# Altium PCB scope_in_pcb.PcbDoc
Units mm, origin at the board's own origin, x right, y up, seen from the top; angles counter-clockwise.
Board outline 107 x 44.9 mm, 2 copper layers (Top Layer, Bottom Layer); 79 components, 59 nets, 236 pads, 54 vias.
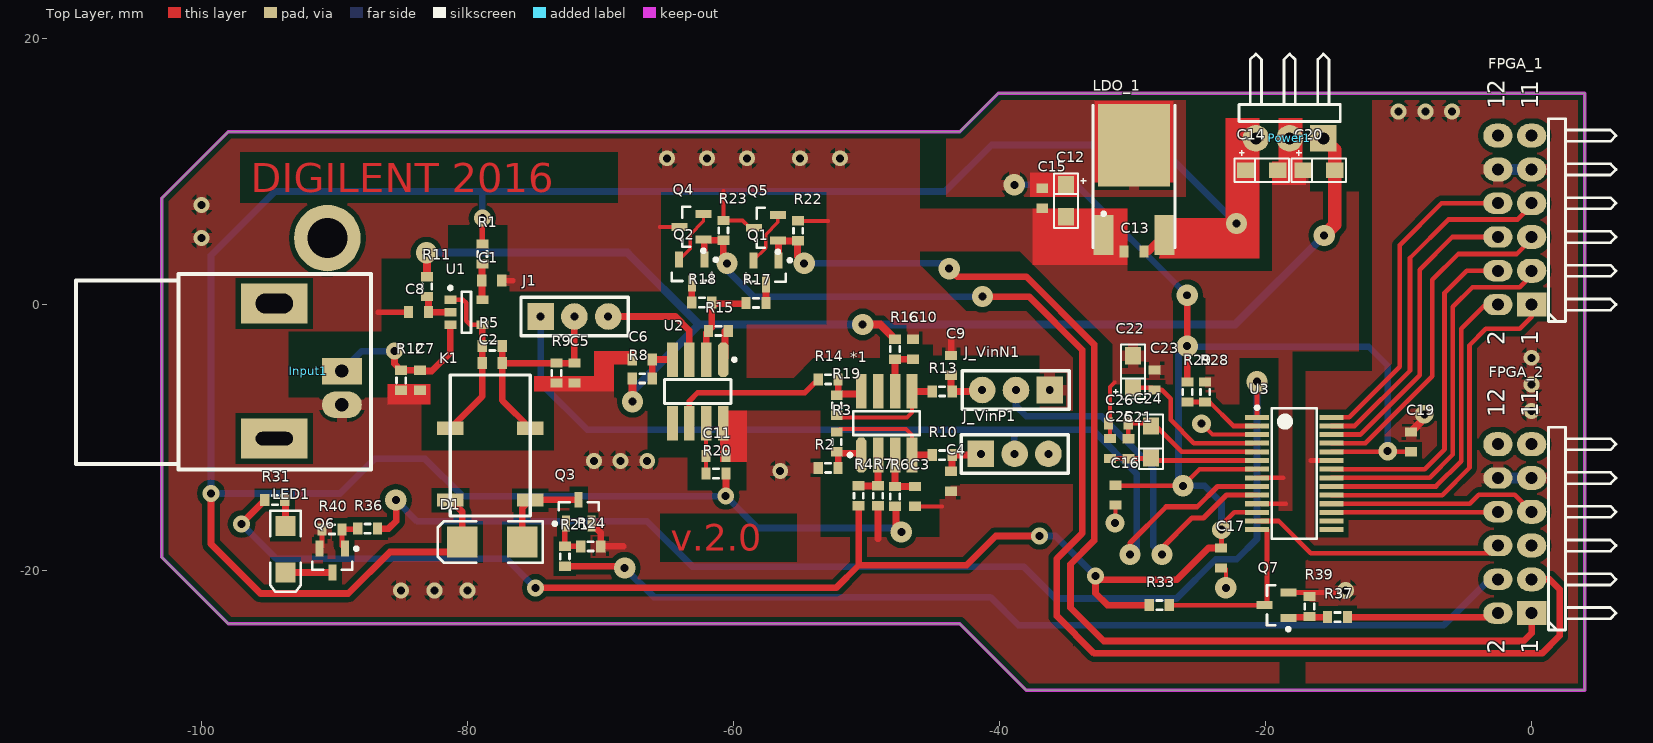
[diagram p0: Top Layer view]
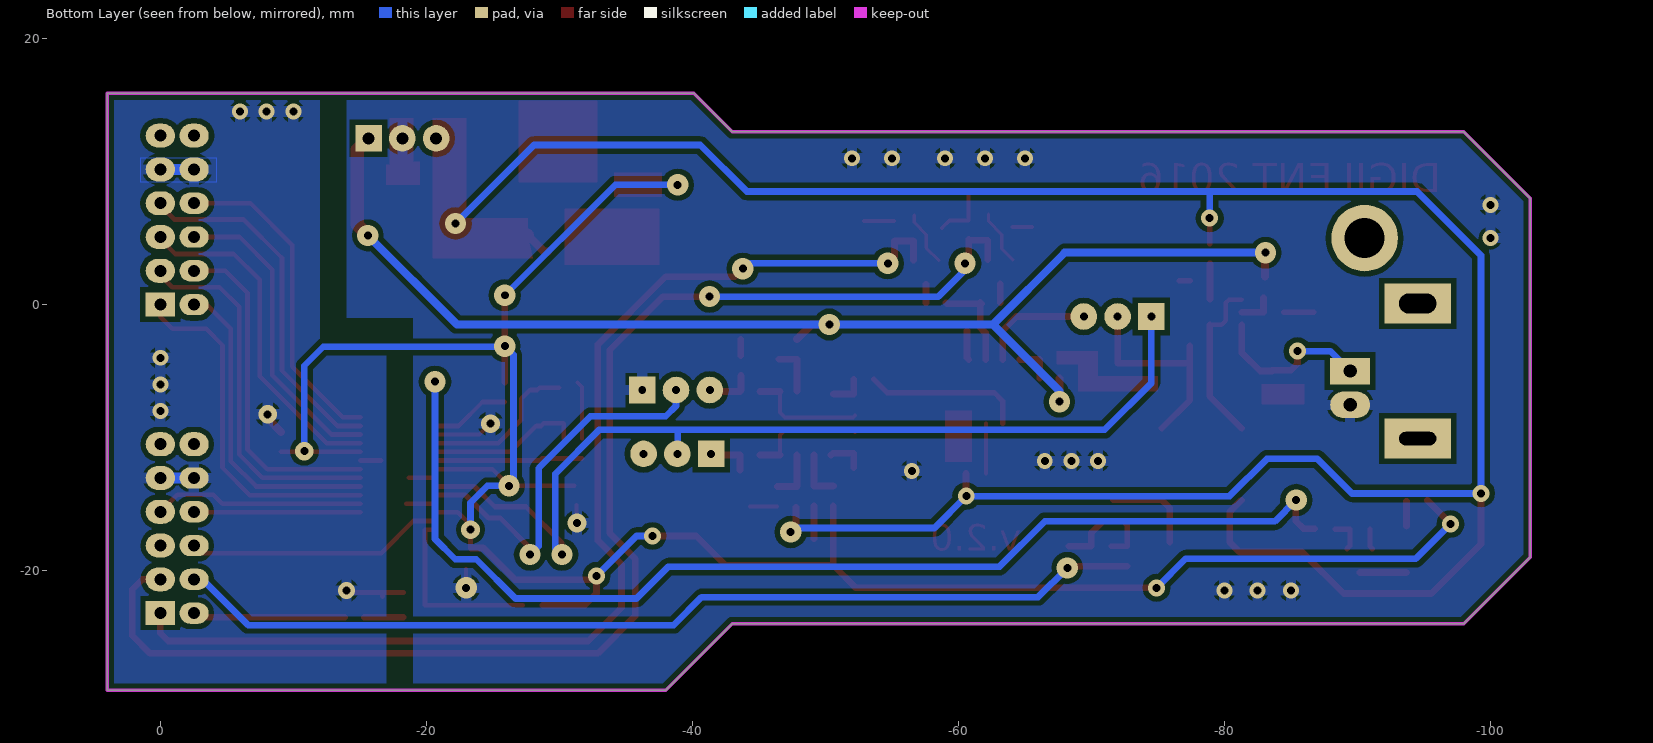
[diagram p1: Bottom Layer view, seen from below]
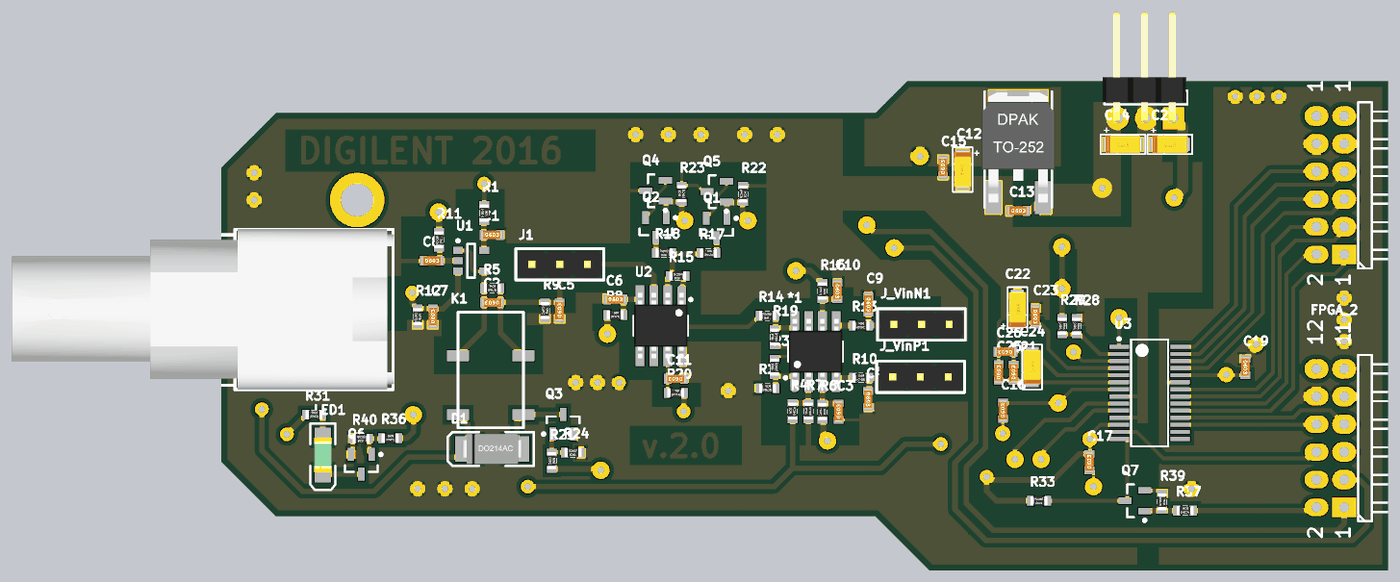
[diagram p2: 3D render of the assembled board from above, using the file's embedded part models]

## Layer stack, top to bottom
Top Solder: solder mask 0.0102, Solder Resist, Dk 3.5
Top Layer: signal copper 0.0356
Dielectric1: dielectric 0.32, FR-4, Dk 4.8
Bottom Layer: signal copper 0.0356
Bottom Solder: solder mask 0.0102, Solder Resist, Dk 3.5

## Board outline
-103,-19 -98,-24 -43,-24 -38,-29 4,-29 4,15.9 -40.1,15.9 -43,13 -98,13 -103,8

## Design rules (kind name [scope] priority, off if disabled: settings)
Clearance [All] p1: gap=0.4
DiffPairsRouting [All] p1: maxlimit=0.254 minlimit=0.254 mostfreqgap=0.254 toplayer_minwidth=0.381 toplayer_maxwidth=0.381 toplayer_prefwidth=0.381 bottomlayer_minwidth=0.381 bottomlayer_maxwidth=0.381 bottomlayer_prefwidth=0.381 maxuncoupledlength=12.7
PolygonConnect [All] p1: connectstyle=Relief reliefconductorwidth=0.8 reliefentries=4 polygonreliefangle="90 Angle" airgapwidth=0.254
RoutingVias [All] p1: holewidth=0.711 width=1.27 viastyle="Through Hole" minholewidth=0.711 minwidth=1.27 maxholewidth=0.711 maxwidth=1.27
SolderMaskExpansion [All] p1: expansion=0.102
UnpouredPolygon [All] p1: allowunpoured=FALSE
Width [All] p1: maxlimit=2 minlimit=0.1 preferedwidth=0.5
28 further rules are at their usual default settings.

## Classes and differential pairs
differential pair VIN: +VIN_P -VIN_N

## Components (designator, comment, footprint, x,y, rotation, side; value= is the part's Value field where it differs from the comment)
*1 "AD8138" "SOIC 8 pini" -48.5,-8.925 r90 top
C1 "Cap" "Condensator SMD(1608)" -78.2,1.8 r270 top
C2 "Cap" "Condensator SMD(1608)" -78.15,-4.4 r90 top
C3 "Cap" "Condensator SMD(1608)" -46.375,-14.425 r0 top
C4 "Cap" "Condensator SMD(1608)" -43.675,-13.275 r180 top
C5 "Cap" "Condensator SMD(1608)" -71.975,-5.15 r0 top
C6 "Cap" "Condensator SMD(1608)" -66.875,-4.125 r270 top
C7 "Cap" "Condensator SMD(1608)" -83.6,-5.7 r0 top
C8 "Cap" "Condensator SMD(1608)" -83.7,-0.575 r270 top
C9 "Cap" "Condensator SMD(1608)" -43.65,-4.575 r180 top
C10 "Cap" "Condensator SMD(1608)" -46.5,-3.35 r180 top
C11 "Cap" "Condensator SMD(1608)" -61.325,-11.4 r90 top
C12 "Cap Pol1" "case A" -35,7.8 r270 top
C13 "Cap" "Condensator SMD(1608)" -29.9,4 r270 top
C14 "Cap Pol1" "case A" -20.3,10.1 r0 top
C15 "Cap" "Condensator SMD(1608)" -36.8,8 r0 top
C16 "Cap" "Condensator SMD(1608)" -31.3,-14.325 r0 top
C17 "Cap" "Condensator SMD(1608)" -23.375,-19.05 r0 top
C19 "Cap" "Condensator SMD(1608)" -9.075,-10.325 r180 top
C20 "Cap Pol1" "case A" -16,10.1 r0 top
C21 "Cap" "Condensator SMD(1608)" -30.325,-10.85 r0 top
C22 "Cap Pol1" "case A" -29.975,-5.05 r90 top
C23 "Cap" "Condensator SMD(1608)" -28.346,-5.671 r180 top
C24 "Cap Pol1" "case A" -28.625,-10.325 r90 top
C25 "Cap" "Condensator SMD(1608)" -31.7,-10.825 r0 top
C26 "Cap" "Condensator SMD(1608)" -31.075,-8.925 r90 top
D1 "1N4007" diodaSMD -78.15,-17.85 r90 top
FPGA_1 "Header 6X2H" HDR2X6H#1 0,0 r90 top
FPGA_2 "Header 6X2H" HDR2X6H#2 0,-23.2 r90 top
Input1 "BNC" "BNC CONNECTOR" -96,-5 r90 top
J1 "Header 3" hdr3 -71.975,-0.9 r0 top
J_VinN1 "Header 3" hdr3 -38.775,-6.425 r180 top
J_VinP1 "Header 3" hdr3 -38.875,-11.225 r0 top
K1 "Relay-SPST" Signal_relay_5VDC -78.3,-12 r90 top
LDO_1 "Component_1" TO-252[me] -29.9,8.6 r0 top
LED1 "LED1" "led smd verde" -93.7,-18.4 r270 top
Power1 "Header 3H" 3pin_header_90 -18.2,12.5 r270 top
Q1 "MOSFET-N" SOT23-3L -57.575,2.425 r270 top
Q2 "MOSFET-N" SOT23-3L -63.15,2.475 r270 top
Q3 "BC547" SOT23-3L -71.65,-15.575 r90 top
Q4 "MOSFET-N" SOT23-3L -63.175,5.85 r180 top
Q5 "MOSFET-N" SOT23-3L -57.575,5.775 r180 top
Q6 "BC547" SOT23-3L -90.175,-19.25 r270 top
Q7 "BC547" SOT23-3L -19.2,-22.6 r180 top
R1 "Res2" "RezistorSMD (1608)" -78.9,3.8 r270 top
R2 "Res2" "RezistorSMD (1608)" -52.9,-12.275 r0 top
R3 "Res2" "RezistorSMD (1608)" -52.25,-10.325 r90 top
R4 "Res2" "RezistorSMD (1608)" -50.6,-14.375 r90 top
R5 "Res2" "RezistorSMD (1608)" -78.15,-3.1 r0 top
R6 "Res2" "RezistorSMD (1608)" -47.875,-14.425 r270 top
R7 "Res2" "RezistorSMD (1608)" -49.15,-14.375 r90 top
R8 "Res2" "RezistorSMD (1608)" -66.875,-5.55 r0 top
R9 "Res2" "RezistorSMD (1608)" -73.325,-5.15 r270 top
R10 "Res2" "RezistorSMD (1608)" -44.325,-11.325 r0 top
R11 "Res2" "RezistorSMD (1608)" -83.05,1.35 r270 top
R12 "Res2" "RezistorSMD (1608)" -85,-5.7 r270 top
R13 "Res2" "RezistorSMD (1608)" -44.325,-6.525 r0 top
R14 "Res2" "RezistorSMD (1608)" -52.9,-5.625 r180 top
R15 "Res2" "RezistorSMD (1608)" -61.15,-1.975 r180 top
R16 "Res2" "RezistorSMD (1608)" -47.875,-3.35 r270 top
R17 "Res2" "RezistorSMD (1608)" -58.325,0.125 r0 top
R18 "Res2" "RezistorSMD (1608)" -62.4,0.15 r180 top
R19 "Res2" "RezistorSMD (1608)" -52.25,-7.575 r90 top
R20 "Res2" "RezistorSMD (1608)" -61.325,-12.7 r0 top
R21 "Res2" "RezistorSMD (1608)" -72.7,-18.925 r270 top
R22 "Res2" "RezistorSMD (1608)" -55.15,5.55 r270 top
R23 "Res2" "RezistorSMD (1608)" -60.775,5.575 r90 top
R24 "Res2" "RezistorSMD (1608)" -70.75,-18.175 r180 top
R28 "Res2" "RezistorSMD (1608)" -24.55,-6.575 r270 top
R29 "Res2" "RezistorSMD (1608)" -25.875,-6.575 r270 top
R31 "Res2" "RezistorSMD (1608)" -94.5,-14.7 r0 top
R33 "Res2" "RezistorSMD (1608)" -28,-22.6 r180 top
R36 "Res2" "RezistorSMD (1608)" -87.525,-16.85 r0 top
R37 "Res2" "RezistorSMD (1608)" -14.6,-23.5 r0 top
R39 "Res2" "RezistorSMD (1608)" -16.7,-22.7 r270 top
R40 "Res2" "RezistorSMD (1608)" -90.2,-16.9 r180 top
U1 "OPA659" SOT23-5_L -80.1,-0.575 r0 top
U2 "ADA4857-1" "SOIC 8 pini" -62.7,-6.525 r270 top
U3 "AD9215" TSSOP28_L -17.85,-12.7 r0 top

## Footprints (in the part's own frame and the unit in brackets; to place one, negate y for a bottom-side part, rotate by r counter-clockwise, add the part's x,y. Pads: shape width x height; smd on the part's side, far side on the other; paste and mask are expansions set on the pad)
3pin_header_90 [mm]
  rect 2x2 hole 0.9: 1(0,2.54)
  round 2 hole 0.9: 2(0,0) 3(0,-2.54)
  silkscreen extent -6.35,-3.81 -1.27,3.81, body extent -9.75,-3.94 0.38,3.68, height 2.51
"BNC CONNECTOR" [mm]
  rect 2x3 hole 1 unplated: 1(0,-6.54)
  oval 2x3 hole 1 unplated: 2(-2.54,-6.54)
  rect 3x5 hole 1 slot 2.8 at 90 deg unplated: ""(-5.08,-1.46)
  rect 3x5 hole 1.5 slot 2.8 at 90 deg unplated: ""(5.08,-1.46)
  silkscreen extent -7.4,-8.74 7.3,13.46, body extent -7.4,-8.84 7.36,26.21, height 16.29
"case A" [mm] "condensator smd tantal case A [3216]"
  rect 1.3x1.2 smd: 1(-1.2,0) 2(1.2,0)
  silkscreen extent -2.05,-0.9 2.05,1.5, body extent -1.7,-0.8 1.7,0.8, height 1.65
"Condensator SMD(1608)" [mm]
  rect 0.9x0.7 smd: 1(0,-0.75) 2(0,0.75)
  body extent -0.4,-1.01 0.39,0.99, height 0.79
diodaSMD [mm]
  rect 2.3x2.3 smd: 1(0,-2.25) 2(0,2.25)
  silkscreen extent -1.55,-3.8 1.55,4.1, body extent -1.39,-2.74 1.41,2.74, height 2.24
HDR2X6H#1 [mm] "Connector; Header; 6x2 Position; Right Angle"
  rect 1.8x2.2 hole 0.9: 1(0,0)
  oval 1.6x2.2 hole 0.9: 2(0,2.54) 4(2.54,2.54) 6(5.08,2.54) 8(7.62,2.54)
  oval 1.8x2.2 hole 0.9: 3(2.54,0) 5(5.08,0) 7(7.62,0) 9(10.16,0) 10(10.16,2.54) 11(12.7,0) 12(12.7,2.54)
  silkscreen extent -1.27,-6.35 13.97,-1.27
HDR2X6H#2 [mm] "Connector; Header; 6x2 Position; Right Angle"
  rect 1.8x2.2 hole 0.9: 1(0,0)
  oval 1.6x2.2 hole 0.9: 2(0,2.54) 4(2.54,2.54) 6(5.08,2.54) 8(7.62,2.54) 10(10.16,2.54)
  oval 1.8x2.2 hole 0.9: 3(2.54,0) 5(5.08,0) 7(7.62,0) 9(10.16,0) 11(12.7,0) 12(12.7,2.54)
  silkscreen extent -1.27,-6.35 13.97,-1.27
hdr3 [mm] "header 3 pini (2,54mm)"
  rect 2x2 hole 0.6: 1(-2.54,0)
  round 2 hole 0.6: 2(0,0) 3(2.54,0)
  silkscreen extent -4.02,-1.45 4.04,1.45, body extent -3.81,-1.24 3.81,1.25, height 8.54
"led smd verde" [mm]
  rect 1.5x1.5 smd: 1(-1.75,0) 2(1.75,0)
  silkscreen extent -2.9,-1.15 3.2,1.15, body extent -1.6,-0.79 1.6,0.81, height 1.11
"RezistorSMD (1608)" [mm]
  rect 0.7x0.9 smd: 1(0.75,0) 2(-0.75,0)
  silkscreen extent -0.2,-0.35 0.2,0.35, body extent -0.77,-0.43 0.78,0.42, height 0.45
Signal_relay_5VDC [mm]
  rect 1x2 smd: 1(-2.7,3) 2(-2.7,-3) 3(2.7,-3) 4(2.7,3)
  silkscreen extent -3.9,-3 6.7,3
"SOIC 8 pini" [mm]
  oct 2.6x0.8 smd: 1(-2.387,1.905)
  rect 2.6x0.8 smd: 2(-2.387,0.635) 3(-2.387,-0.635) 4(-2.387,-1.905) 5(2.413,-1.905) 6(2.413,-0.635) 7(2.413,0.635) 8(2.413,1.905)
  silkscreen extent -2.51,-2.5 0.91,2.88, body extent -3,-2.45 3,2.45, height 1.75
SOT23-3L [mm] "SOT23, 3-Leads, Body 2.9x1.3mm, Pitch 0.95mm, Lead Span 2.5mm, IPC High Density"
  rect 1.2x0.6 smd: 1(-0.9,0.95) 2(-0.9,-0.95) 3(0.9,0)
  silkscreen extent -1.02,-1.5 0.7,1.93, body extent -0.7,-1.5 0.7,1.5, height 1.1
SOT23-5_L [mm] "SOT23, 5-Leads, Body 2.9x1.6mm, Pitch 0.95mm, Lead Span 2.8mm, IPC High Density"
  rect 0.9x0.65 smd: 1(-1.2,0.95) 2(-1.2,0) 3(-1.2,-0.95) 4(1.2,-0.95) 5(1.2,0.95)
  silkscreen extent -1.32,-1.55 0.35,1.95, body extent -0.9,-1.55 0.9,1.55, height 1.45
TO-252[me] [mm]
  rect 1.5x3 smd: 1(-2.285,-3.375) 3(2.285,-3.375)
  rect 5.4x6.2 smd: 2(0,3.375)
  silkscreen extent -3.09,-4.32 3.09,6.38, body extent -3.37,-3.81 3.37,6.29, height 2.37
TSSOP28_L [mm] "TSOP, 28-Leads, Body 9.7x4.4mm, Pitch 0.65mm, IPC High Density"
  rect 1.8x0.38 smd: 1(-2.8,4.225) 2(-2.8,3.575) 3(-2.8,2.925) 4(-2.8,2.275) 5(-2.8,1.625) 6(-2.8,0.975) 7(-2.8,0.325) 8(-2.8,-0.325) 9(-2.8,-0.975) 10(-2.8,-1.625) 11(-2.8,-2.275) 12(-2.8,-2.925) 13(-2.8,-3.575) 14(-2.8,-4.225) 15(2.8,-4.225) 16(2.8,-3.575) 17(2.8,-2.925) 18(2.8,-2.275) 19(2.8,-1.625) 20(2.8,-0.975) 21(2.8,-0.325) 22(2.8,0.325) 23(2.8,0.975) 24(2.8,1.625) 25(2.8,2.275) 26(2.8,2.925) 27(2.8,3.575) 28(2.8,4.225)
  silkscreen extent -2.92,-4.9 1.7,5.07, body extent -2.25,-4.9 2.25,4.9, height 1.2

## Part data
*1: "Low Distortion,  Differential ADC Driver"
C1 C2 C3 C4 C5 C6 C7 C8 C9 C10 C11 C13 C15 C16 C17 C19 C21 C23 C25 C26: "Capacitor"
C12 C14 C20 C22 C24: "Polarized Capacitor (Radial)"
D1: library part Diode, "Default Diode"
FPGA_1 FPGA_2: "Header, 6-Pin, Dual row, Right Angle"
Input1: "BNC Elbow Connector"
J1 J_VinN1 J_VinP1: "Header, 3-Pin"
K1: "Single-Pole Single-Throw Relay"
LED1: "Typical RED GaAs LED"
Power1: "Header, 3-Pin, Right Angle"
Q1 Q2 Q4 Q5: "N-Channel MOSFET"
Q3 Q6 Q7: library part QNPN, "NPN Bipolar Transistor"
R1 R2 R3 R4 R5 R6 R7 R8 R9 R10 R11 R12 R13 R14 R15 R16 R17 R18 R19 R20 R21 R22 R23 R24 R28 R29 R31 R33 R36 R37 R39 R40: "Resistor"
U1: "Wideband, Unity-Gain Stable, JFET-Input  Operational Amplifier"
U2: "Ultralow Distortion, Low Power,  Low Noise, High Speed Op Amp"
U3: "10-Bit, 65/80/105 MSPS,  3 V A/D Converter"

## Free pads (board coordinates)
  round 5 hole 3: ""(-90.55,5)

## Via types
v1: diameter 1.2, hole 0.6, Top Layer to Bottom Layer, 20 vias
v2: diameter 1.6, hole 0.6, Top Layer to Bottom Layer, 20 vias
v3: diameter 1.27, hole 0.6, Top Layer to Bottom Layer, 9 vias
v4: diameter 1.4, hole 0.6, Top Layer to Bottom Layer, 5 vias

## Nets (pads, with @x,y where several pads share a name; then routed paths per layer and width w, separated by ;. In a path a pad name is that pad's centre, name@x,y a point inside that pad or via, vN(x,y) a via of type N, cw(c..) or ccw(c..) an arc to the next point about the centre after c; other vN are vias at no path point)
+3.3V: C12.1 C15.2 C16.2 C17.2 C19.2 LDO_1.2 R4.2 R29.2 R31.2 R33.1 U3.7 U3.12 U3.24 | length 175.5
  Top Layer w0.35: C16.2@-31.125,-13.625 v2(-26.225,-13.625) -24.975,-12.375 U3.7 ; C17.2@-23.325,-18.25 v4(-23.325,-16.925) -23.325,-16.575 -22.375,-15.625 U3.12 ; U3.24 C19.2
  Top Layer w0.5: v3(-97,-16.5) -97,-16.45 R31.2 ; v3(-74.9,-21.3) -52.3,-21.3 -50.6,-19.6 ; R4.2 -50.6,-19.6 ; v3(-37,-17.4) -40.3,-17.4 -42.5,-19.6 -50.6,-19.6 ; R33.1 -31.9,-22.6 -32.8,-21.7 v3(-32.8,-20.4) -32.5,-20.7 -26.7,-20.7 -24.3,-18.3 C17.2 ; R29.2@-25.9,-5.825 v2(-25.9,0.7)
  Bottom Layer w0.5: v3(-97,-16.5) -94.4,-19.1 -77.1,-19.1 v3(-74.9,-21.3) ; v2(-38.9,9) -34.2,9 v2(-25.9,0.7) ; v3(-37,-17.4) -35.8,-17.4 v3(-32.8,-20.4) ; v4(-23.325,-16.925) -23.325,-14.9 -24.6,-13.625 v2(-26.225,-13.625) -26.55,-13.3 -26.55,-3.775 v2(-25.9,-3.125) -25.85,-3.175 -12.25,-3.175 -10.825,-4.6 v4(-10.825,-11.025)
+5V: C13.2 C14.1 D1.2 K1.1 LDO_1.3 Power1.3 R1.2 R6.1 R20.1 | length 207.7
  Top Layer w0.4: R1.2 v3(-78.9,6.5)
  Top Layer w0.5: v3(-99.3,-14.2) -99.3,-18 -95.575,-21.725 -88.975,-21.725 -85.85,-18.6 -81.15,-18.6 D1.2 -80.4,-15.6 K1.1 ; v3(-60.6,-14.4) -60.575,-14.375 R20.1 ; R6.1@-47.8,-15.25 -47.8,-16.7 v2(-47.4,-17.1) ; v2(-22.2,6.1) v2@-22.15,6.05
  Top Layer w0.6: C13.2 -28.84,4 LDO_1.3
  Top Layer w1: LDO_1.3 -22.975,5.225 -22.15,6.05 -21.5,6.7 C14.1 -21.5,11.74 Power1.3
  Bottom Layer w0.5: v3(-78.9,6.5) -78.9,8.35 -78.75,8.5 ; v2@-47.8,-16.8 -58.2,-16.8 v3(-60.6,-14.4) -80.4,-14.4 -83.2,-11.6 -87,-11.6 -89.6,-14.2 v3(-99.3,-14.2) -99.3,3.7 -94.5,8.5 -44.1,8.5 -40.6,12 -28.1,12 v2(-22.2,6.1)
-5V: C20.2 Power1.1 R8.2 R11.2 R16.2 | length 94.6
  Top Layer w0.6: v2(-83.1,3.9) -83.05,3.85 R11.2 ; R8.2 -67.6,-5.575 v2@-67.6,-7.2 ; v2(-50.3,-1.5) -48.975,-1.5 R16.2
  Top Layer w1: Power1.1 -14.8,11.64 C20.2 -14.8,6 v2(-15.6,5.2)
  Bottom Layer w0.6: v2(-83.1,3.9) -68,3.9 -62.6,-1.5 ; v2@-67.6,-7.2 -67.6,-6.5 -62.6,-1.5 ; v2(-15.6,5.2) -22.3,-1.5 v2(-50.3,-1.5) -62.6,-1.5
  other v2: -67.6,-7.3
AGND: C1.2 C3.1 C4.2 C5.1 C6.1 C7.1 C8.1 C9.1 C10.1 C11.1 C12.2 C13.1 C14.2 C15.1 C16.1 C17.1 C20.1 C22.2 C23.1 C25.2 C26.2 Input1.2 J_VinN1.1 LDO_1.1 Power1.2 Q3.2 Q4.3 Q5.3 Q6.2 R2.2 R7.2 R9.1 R12.1 R22.2 R23.1 R24.2 R28.2 R40.1 U2.8 U3.3 U3.8 U3.11 | length 40
  Top Layer w0.3: -65.55,5.85 Q4.3 ; -60.775,8.525 R23.1 -59.325,6.325 Q5.3@-58.775,5.775 ; R22.2 -52.9,6.3 ; C3.1 -44.325,-15.175 ; C25.2 -31.7,-6.2 -31.35,-5.85 ; v4@-31.3,-16.4 C16.1 ; v4(-24.825,-8.95) -24,-9.775 U3.3 ; v2(-23,-21.3) C17.1@-23,-19.9
  Top Layer w0.35: U3.11 -18.5,-14.975 ; U3.8 -18.7,-13.025
  Top Layer w0.4: Q6.2 -90.95,-18.175 R40.1 ; -86.725,-0.575 C8.1 ; C1.2 -76.6,1.8
  Top Layer w0.5: Q3.2 -70,-17.175 R24.2 -68.3,-18.175 ; -49.15,-17.6 R7.2 ; C9.1 -43.65,-2.6 ; LDO_1.1 -30.96,4 C13.1
  other v1: -85,-21.5 -82.5,-21.5 -80,-21.5 -56.5,-12.5 -70.5,-11.75 -68.5,-11.75 -66.5,-11.75 -100,5 -100,7.5 -65,11 -62,11 -59,11 -55,11 -52,11
  other v4: -31.325,-16.425
CLK: FPGA_2.6 U3.13 | length 19.4
  Top Layer w0.35: U3.13 -19.025,-16.275 -16.6,-18.7 -3.12,-18.7 FPGA_2.6
D0: FPGA_2.8 U3.17 | length 13.5
  Top Layer w0.35: U3.17 -2.585,-15.625 FPGA_2.8 FPGA_2.8@-3.52,-15.58
D1: FPGA_2.7 U3.18 | length 15.9
  Top Layer w0.35: U3.18 -4.65,-14.975 -3.975,-14.3 -1.28,-14.3 FPGA_2.7
D2: FPGA_1.1 U3.19 | length 26.9
  Top Layer w0.35: U3.19 -6.725,-14.325 -4.675,-12.275 -4.675,-3.05 -3.45,-1.825 -0.9,-1.825 0,-0.925 FPGA_1.1
D3: FPGA_1.2 U3.20 | length 24
  Top Layer w0.35: U3.20 -7.2,-13.675 -5.3,-11.775 -5.3,-1.825 -3.475,0 FPGA_1.2
D4: FPGA_1.3 U3.21 | length 28.2
  Top Layer w0.35: U3.21 -7.675,-13.025 -5.925,-11.275 -5.925,-0.175 -4.45,1.3 -0.9,1.3 0,2.2 FPGA_1.3
D5: FPGA_1.4 U3.22 | length 25.6
  Top Layer w0.35: U3.22 -8.05,-12.375 -6.55,-10.875 -6.55,0.875 -4.885,2.54 FPGA_1.4
D6: FPGA_1.5 U3.25 | length 25.8
  Top Layer w0.35: U3.25 -12.5,-10.425 -7.475,-5.4 -7.475,1.85 -5.525,3.8 -1.125,3.8 0,4.925 FPGA_1.5
D7: FPGA_1.6 U3.26 | length 23.3
  Top Layer w0.35: U3.26 -12.9,-9.775 -8.425,-5.3 -8.425,2.625 -5.97,5.08 FPGA_1.6
D8: FPGA_1.7 U3.27 | length 27.1
  Top Layer w0.35: U3.27 -13.3,-9.125 -9.15,-4.975 -9.15,3.5 -6.25,6.4 -1.05,6.4 0,7.45 FPGA_1.7
D9: FPGA_1.8 U3.28 | length 24.5
  Top Layer w0.35: U3.28 -13.725,-8.475 -9.925,-4.675 -9.925,4.475 -6.78,7.62 FPGA_1.8
DGND: C19.1 FPGA_1.9 FPGA_1.10 FPGA_2.9 FPGA_2.10 Q7.2 R39.2 U3.23 | length 12.6
  Top Layer w0.35: Q7.2 -14.15,-21.65 v3(-14,-21.5) ; R39.2 R39.2@-16.7,-21.75 ; -16.6,-11.725 U3.23
  Top Layer w0.6: C19.1 v4@-8.075,-8.575
  Bottom Layer w0.8: FPGA_2.10 FPGA_2.9 ; FPGA_1.10 FPGA_1.9
  other v1: 0,-8 0,-6 0,-4 -10,14.5 -8,14.5 -6,14.5
  other v4: -8.075,-8.25
FB_1: FPGA_2.1 Q1.1 Q5.1 R22.1 | length 87.1
  Top Layer w0.5: Q1.1 -56.625,4.775 -55.2,4.775 -55.2,3.6 v2(-54.7,3.1) ; v2(-43.8,2.7) -43.2,2.1 -38,2.1 -32.9,-3 -32.9,-17.75 -34.675,-19.525 -34.675,-22.8 -32.175,-25.3 -0.6,-25.3 0,-24.7 FPGA_2.1
  Bottom Layer w0.5: v2(-54.7,3.1) -44.2,3.1 v2(-43.8,2.7)
FB_2: FPGA_2.3 Q2.1 Q4.1 R23.2 | length 100.7
  Top Layer w0.5: Q2.1 -62.2,4.825 -60.85,4.825 R23.2@-60.775,4.9 ; R23.2 -60.775,3.475 -60.5,3.2 v2(-60.5,3.1) ; v2(-41.3,0.6) -37.8,0.6 -33.8,-3.4 -33.8,-17.2 -35.7,-19.1 -35.7,-23.425 -32.9,-26.225 0.775,-26.225 2.1,-24.9 2.1,-21.4 1.36,-20.66 FPGA_2.3
  Bottom Layer w0.5: v2(-60.5,3.1) -60.5,2.6 -58.5,0.6 v2(-41.3,0.6)
GND: 
Net*1_1: *1.1 R2.1 R3.2 | length 2.9
  Top Layer w0.5: R2.1 -52.15,-11.175 -50.582,-11.175 -50.425,-11.332 *1.1
Net*1_2: *1.2 R4.1 R7.1 | length 3.8
  Top Layer w0.53: R4.1 R7.1 -49.15,-11.312 *1.2
Net*1_3: *1.3 C3.2 R6.2 | length 3.9
  Top Layer w0.5: *1.3 -47.875,-11.322 R6.2 C3.2
Net*1_4: *1.4 R3.1 R10.2 | length 9
  Top Layer w0.3: R3.1 -52.025,-9.35 -47.05,-9.35 -46.595,-9.805 *1.4
  Top Layer w0.53: *1.4@-46.582,-11.325 R10.2
Net*1_5: *1.5 R13.2 R19.2 | length 9
  Top Layer w0.3: R19.2 -52.075,-8.5 -46.975,-8.5 -46.595,-8.12 *1.5
  Top Layer w0.53: *1.5@-46.582,-6.525 R13.2
Net*1_6: *1.6 C10.2 R16.1 | length 3.8
  Top Layer w0.5: *1.6 -47.875,-6.502 R16.1 C10.2
Net*1_8: *1.8 R14.2 R19.1 | length 2.6
  Top Layer w0.5: R14.2 -52.15,-6.725 *1.8@-50.618,-6.725
NetC1_1: C1.1 R1.1 U1.5 | length 2.7
  Top Layer w0.5: U1.5@-78.925,0.4 -78.925,1.875 R1.1@-78.925,3.075
NetC2_1: C2.1 C5.2 J1.2 K1.3 R5.1 R9.2 | length 16
  Top Layer w0.5: R5.1 C2.1 ; K1.3 -77.4,-7.2 C2.1 ; J1.2 C5.2 R9.2 C2.1
NetC2_2: C2.2 K1.4 R5.2 U1.1 U1.4 | length 12.7
  Top Layer w0.35: U1.1 -80.35,0.375 -80.1,0.125 -80.1,-1.225 -79.8,-1.525 U1.4
  Top Layer w0.5: K1.4 -78.9,-6.9 C2.2 U1.4
NetC4_1: C4.1 J_VinP1.1 R10.1 | length 3.5
  Top Layer w0.53: C4.1@-43.575,-12.425 R10.1 J_VinP1.1@-41.19,-11.325
NetC6_2: C6.2 R8.1 U2.4 | length 2.9
  Top Layer w0.5: R8.1 C6.2 U2.4@-64.618,-4.125
NetC7_2: C7.2 Input1.1 R12.2 U1.3 | length 12.6
  Top Layer w0.5: v3(-85.5,-3.5) -85.5,-4.45 R12.2 C7.2 ; C7.2@-83.6,-5 -82.7,-5 -81.3,-3.6 U1.3
  Bottom Layer w0.5: Input1.1 -87.96,-3.5 v3(-85.5,-3.5)
NetC8_2: C8.2 R11.1 U1.2 | length 2.7
  Top Layer w0.5: R11.1@-82.95,0.5 C8.2 U1.2
NetC9_2: C9.2 J_VinN1.3 R13.1 | length 3.5
  Top Layer w0.53: R13.1@-43.65,-6.45 C9.2 ; R13.1 J_VinN1.3@-41.185,-6.525
NetC11_2: C11.2 R20.2 U2.7 | length 3.8
  Top Layer w0.3: R20.2 C11.2 ; C11.2@-62.065,-11.39 U2.7
NetC21_1: C21.1 C24.1 C25.1 U3.6 | length 11.1
  Top Layer w0.35: C25.1 -28.675,-11.575 -28.525,-11.725 U3.6
NetC21_2: C21.2 C24.2 C26.1 U3.5 | length 11.7
  Top Layer w0.35: C21.2 C26.1 -28.825,-8.925 C24.2 -28.275,-9.125 -26.325,-11.075 U3.5
NetC22_1: C22.1 C23.2 U3.4 | length 12
  Top Layer w0.35: C22.1 -28.517,-6.25 C23.2 -27.804,-6.421 -27.15,-7.075 -27.15,-8.675 -25.4,-10.425 U3.4
NetJ1_3: J1.3 U2.3 | length 8.7
  Top Layer w0.5: J1.3 -64.375,-0.9 -63.335,-1.94 U2.3
NetLED1_1: LED1.1 R31.1 | length 1.8
  Top Layer w0.5: LED1.1 R31.1@-93.7,-14.8
NetLED1_2: LED1.2 Q6.3 | length 3.5
  Top Layer w0.5: LED1.2 Q6.3
NetQ1_2: Q1.2 Q5.2 | length 4.2
  Top Layer w0.25: Q1.2 -57.6,4.25 -57.6,5.26 -56.675,6.185 Q5.2
NetQ1_3: Q1.3 R17.1 | length 1.4
  Top Layer w0.5: R17.1 Q1.3
NetQ2_2: Q2.2 Q4.2 | length 4.2
  Top Layer w0.25: Q2.2 -63.275,4.2 -63.275,5.26 -62.275,6.26 Q4.2
NetQ2_3: Q2.3 R18.1 | length 1.4
  Top Layer w0.5: R18.1 Q2.3
NetQ3_1: Q3.1 R21.2 R24.1 | length 3
  Top Layer w0.4: Q3.1 -72.7,-16.475 R21.2 R24.1
NetQ6_1: Q6.1 R36.2 R40.2 | length 2.7
  Top Layer w0.4: Q6.1 -89.45,-18.125 R40.2 R36.2@-88.325,-16.9
NetQ7_1: Q7.1 R37.2 R39.1 | length 2.9
  Top Layer w0.5: Q7.1@-18.25,-23.5 R37.2
NetR14_1: R14.1 U2.6 | length 12
  Top Layer w0.4: U2.6 -63.335,-7.26 -62.7,-6.625 -54.65,-6.625 R14.1
NetR15_1: R15.1 R17.2 R18.2 U2.2 | length 7.1
  Top Layer w0.5: U2.2 -62.065,-2.14 R15.1 -61.65,-1.725 R18.2 R18.2@-61.75,0.05 ; R18.2@-61.565,0.065 -59.135,0.065 R17.2
NetR15_2: R15.2 U2.1 | length 2.2
  Top Layer w0.5: U2.1 -60.65,-3.993 R15.2@-60.65,-1.975
NetR28_1: R28.1 R29.1 U3.2 | length 6
  Top Layer w0.35: R29.1 R28.1 -24.225,-7.325 -22.425,-9.125 U3.2
OR: R36.1 U3.1 | length 87.4
  Top Layer w0.35: U3.1 v2(-20.65,-5.8)
  Top Layer w0.5: R36.1 -85.95,-16.85 -85.375,-16.275 v2@-85.375,-14.7
  Bottom Layer w0.5: v2(-85.4,-14.7) -83.8,-16.3 -66.5,-16.3 -63.1,-19.7 -38.2,-19.7 -35.8,-22.1 -26.7,-22.1 -23.75,-19.15 -22.175,-19.15 -20.65,-17.625 v2(-20.65,-5.8)
PD: Q7.3 R33.2 U3.14 | length 13.8
  Top Layer w0.35: R33.2 -19.9,-22.6 -19.9,-16.925 U3.14
PD_FPGA: FPGA_2.2 R37.1 | length 11.4
  Top Layer w0.5: R37.1 -2.84,-23.5 FPGA_2.2
Q_RELAY: D1.1 K1.2 Q3.3 | length 7.1
  Top Layer w0.5: D1.1 -75.9,-15.3 K1.2 -75.275,-14.675 Q3.3
RELAY: FPGA_2.4 R21.1 | length 73.4
  Top Layer w0.5: R21.1 -68.325,-19.675 v2(-68.2,-19.8)
  Bottom Layer w0.5: v2(-68.2,-19.8) -66,-22 -40.7,-22 -38.6,-24.1 -6.6,-24.1 -3.16,-20.66 FPGA_2.4
VIN_N: J_VinN1.2 U3.10 | length 29.5
  Top Layer w0.381: v2(-27.8,-18.8) -27.8,-18.3 -25.55,-16.05 -24.675,-16.05 -22.95,-14.325 U3.10
  Bottom Layer w0.5: J_VinN1.2 -38.775,-7.625 -38,-8.4 -32.35,-8.4 -28.45,-12.3 -28.45,-18.15 v2(-27.8,-18.8)
VIN_P: J1.1 J_VinP1.2 U3.9 | length 73
  Top Layer w0.381: v2(-30.2,-18.8) -30.2,-17.925 -27.475,-15.2 -25.15,-15.2 -23.625,-13.675 U3.9
  Bottom Layer w0.381: J_VinP1.2 J_VinP1.2@-38.875,-11.2
  Bottom Layer w0.5: J1.1 -74.515,-5.9 -71.015,-9.4 -38.9,-9.4 ; J_VinP1.2 -38.9,-11.2 -38.9,-9.4 ; v2(-30.2,-18.8) -29.7,-18.3 -29.7,-12.725 -33.025,-9.4 -38.9,-9.4
pads on no net: *1.7 FPGA_1.11 FPGA_1.12 FPGA_2.5 FPGA_2.11 FPGA_2.12 Input1. J_VinP1.3 U2.5 U3.15 U3.16

## Polygon pours and split planes (outlines as drawn)
DGND on Bottom Layer "GND" (solid, shelved, pour order 10): -3.71,11 1.17,11 1.5,11 1.5,9.25 1.107,9.25 -3.647,9.25 -4.25,9.25 -4.25,11
AGND on Bottom Layer "GND" (solid, remove dead copper, pour order 11): -40.05,15.9 -14,15.9 -14,11 -14,-1 -17,-1 -19,-1 -19,-2 -19,-29 -38,-29 -43,-24 -98,-24 -103,-19 -103,8 -98,13 -43,13
DGND on Bottom Layer "GND" (solid, remove dead copper, pour order 9): 4,-29 4,15.9 -8,15.9 -12,15.9 -12,10 -12,-3 -16,-3 -17,-3 -17,-9 -17,-29 -12,-29
AGND on Top Layer "GND" (solid, pour order 29): -34.5,-25.49 -33.165,-26.825 -19.1,-26.825 -18.975,-26.825 -18.975,-27.925 -18.975,-28.514 -34.5,-28.514
AGND on Top Layer "GND" (solid, remove dead copper, pour order 25): -46,7.2 -30.4,7.2 -30.4,4.1 -30.4,2.5 -27,2.5 -19.5,2.5 -19.5,8.7 -19.5,10.7 -18.9,10.7 -18.8,10.7 -18.8,12.6 -18.8,14.7 -17.6,14.7 -17.4,14.7 -17.4,12.1 -17.4,10.5 -17,10.5 -16.7,10.5 -16.7,9 -16.7,8.5 -13.6,8.5 -13,8.5 -13,0.5 -13,-3.5 -16,-3.5 -18,-3.5 -18,-10.5 -18,-15.5 -19,-15.5 -19,-12.5 -19,-4 -21.5,-4 -22,-4 -22,-6 -22,-7.5 -24,-7.5 -24.5,-7.5 -24.5,-6 -24.5,0.5 -26,0.5 -27,0.5 -27,-2 -27,-6 -30,-6 -31.5,-6 -31.5,-4.5 -31.5,-3 -34,-0.5 -38.5,4 -46,4
AGND on Top Layer "GND" (solid, pour order 23): -50.5,12.4 -50.5,12.5 -49.8,12.5 -46,12.5 -46,8.5 -50.5,8.5 -50.5,9.9
DGND on Top Layer "GND" (solid, remove dead copper, pour order 19): 4,16 4,-29 -14,-29 -17,-29 -17,-15 -17,-5 -12,-5 -12,7 -12,16 -11,16
+3.3V on Top Layer "GND" (solid, remove dead copper, pour order 17): -26,15.9 -40.2,15.9 -43.3,12.8 -44,12.8 -44,11.3 -44,8.1 -36.7,8.1 -26,8.1 -26,10.6
AGND on Top Layer "GND" (solid, remove dead copper, pour order 13): -103,8 -98,13 -52,13 -50,13 -46,9 -46,3 -43,0 -42.5,-0.5 -40,-0.5 -38,-0.5 -37,-1.5 -34.5,-4 -34.5,-7 -34.5,-8 -36.5,-8 -37,-8 -37,-5.5 -37,-3.825 -43.65,-3.825 -45,-3.825 -45,-3.5 -45,-3 -46.5,-3 -47,-3 -47,-2 -47,-1.5 -49,-1.5 -49,-3 -49,-4 -54,-4 -55.5,-5.5 -56,-5.5 -59,-5.5 -59,-5 -59,-1.5 -56.5,-1.5 -53,-1.5 -53,3.5 -53,8.5 -56.5,8.5 -65.5,8.5 -65.5,6.5 -65.5,1 -69,1 -77,1 -77,4 -77,6 -78.5,6 -81.5,6 -81.5,3.5 -83.5,3.5 -86.5,3.5 -86.5,0 -86.5,-2 -90,-2 -93.5,-2 -93.5,-4 -93.5,-7 -90,-7 -86,-7 -86,-6.5 -83.5,-6.5 -83.5,-7 -83.5,-11 -81,-11 -73.5,-11 -73.5,-8 -73.5,-6 -72,-6 -69,-6 -69,-7 -67,-7 -66.5,-7 -66.5,-9 -66.5,-11.5 -64.5,-11.5 -63.5,-11.5 -63.5,-12 -63.5,-14 -59.5,-14 -59,-14 -59,-10 -59,-8 -58,-8 -53.5,-8 -53.5,-11.5 -53.5,-17.5 -49.5,-17.5 -44.5,-17.5 -44.5,-14 -44.5,-13.5 -43,-13.5 -34.5,-13.5 -34.5,-16 -34.5,-29 -36.5,-29 -38,-29 -43,-24 -98,-24 -103,-19

## Keep-outs
Keep-Out Layer:
  lines w0.25: 4,-29 4,13 4,15.9
  lines w0.254: 4,-29 -38,-29 -43,-24 -98,-24 -103,-19 -103,8 -98,13 -43,13 -40.1,15.9 -40,15.9 4,15.9

## Other copper
Top Layer:
  region net AGND: -19,14 -19,10.75 -19.5,10.75 -19.5,9 -17,9 -17,10.5 -17.25,10.5 -17.25,14
  region net AGND: -59,-8 -61,-8 -61,-11.8 -59,-11.8
  region net AGND: -73.5,-6.504 -75,-6.504 -75,-5.4 -70.5,-5.4 -70.5,-3.5 -67.4,-3.5 -67.4,-4.5 -69,-4.5 -69,-6.504
  region net AGND: -86,-6 -82.8,-6 -82.8,-7.5 -86,-7.5
  region net +5V: -27.615,5.225 -27.615,6.5 -23,6.5 -23,14 -20.5,14 -20.5,3.5 -28,3.5
  region net AGND: -37.504,7.2 -30.4,7.2 -30.4,3 -37.5,3 -37.5,4.5
  region net +3.3V: -34.146,8.1 -34.146,9.904 -37.7,9.9 -37.7,8.1
  region net +3.3V: -32.854,15.329 -26.946,15.329 -26.946,9.2 -32.854,9.2
  text "DIGILENT 2016" at -96.3,8.45 h2.2
  text "v.2.0" at -64.725,-18.525 h2

## Text inside footprints (layer, text, board x,y; h text height)
FPGA_1: Top Overlay "2" at -2.032,-3.048 h1.27 r90; Top Overlay "1" at 0.508,-3.048 h1.27 r90; Top Overlay "1" at 0.508,14.732 h1.27 r90; Top Overlay "1" at 0.508,15.748 h1.27 r90; Top Overlay "12" at -2.032,14.732 h1.27 r90
FPGA_2: Top Overlay "2" at -2.032,-26.248 h1.27 r90; Top Overlay "1" at 0.508,-26.248 h1.27 r90; Top Overlay "1" at 0.508,-8.468 h1.27 r90; Top Overlay "1" at 0.508,-7.452 h1.27 r90; Top Overlay "12" at -2.032,-8.468 h1.27 r90